# Altium PCB PM06-2305-IMU小板.PcbDoc
Units mil, origin at the board's own origin, x right, y up, seen from the top; angles counter-clockwise.
Board outline 600 x 480 mil, 2 copper layers (Top Layer, Bottom Layer); 5 components, 10 nets, 34 pads, 114 vias.
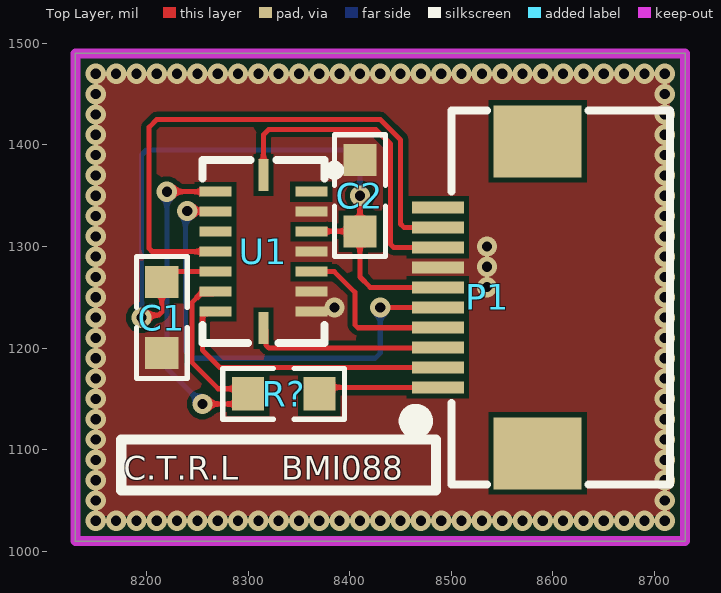
[diagram p0: Top Layer view]
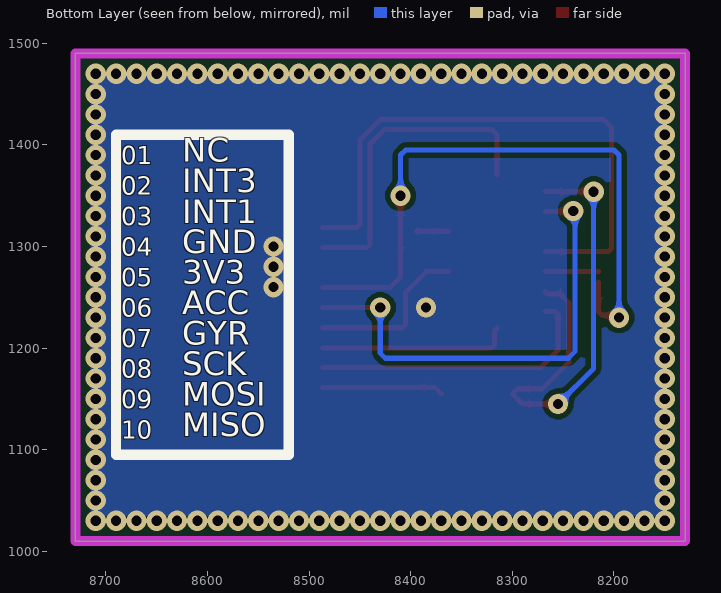
[diagram p1: Bottom Layer view, seen from below]
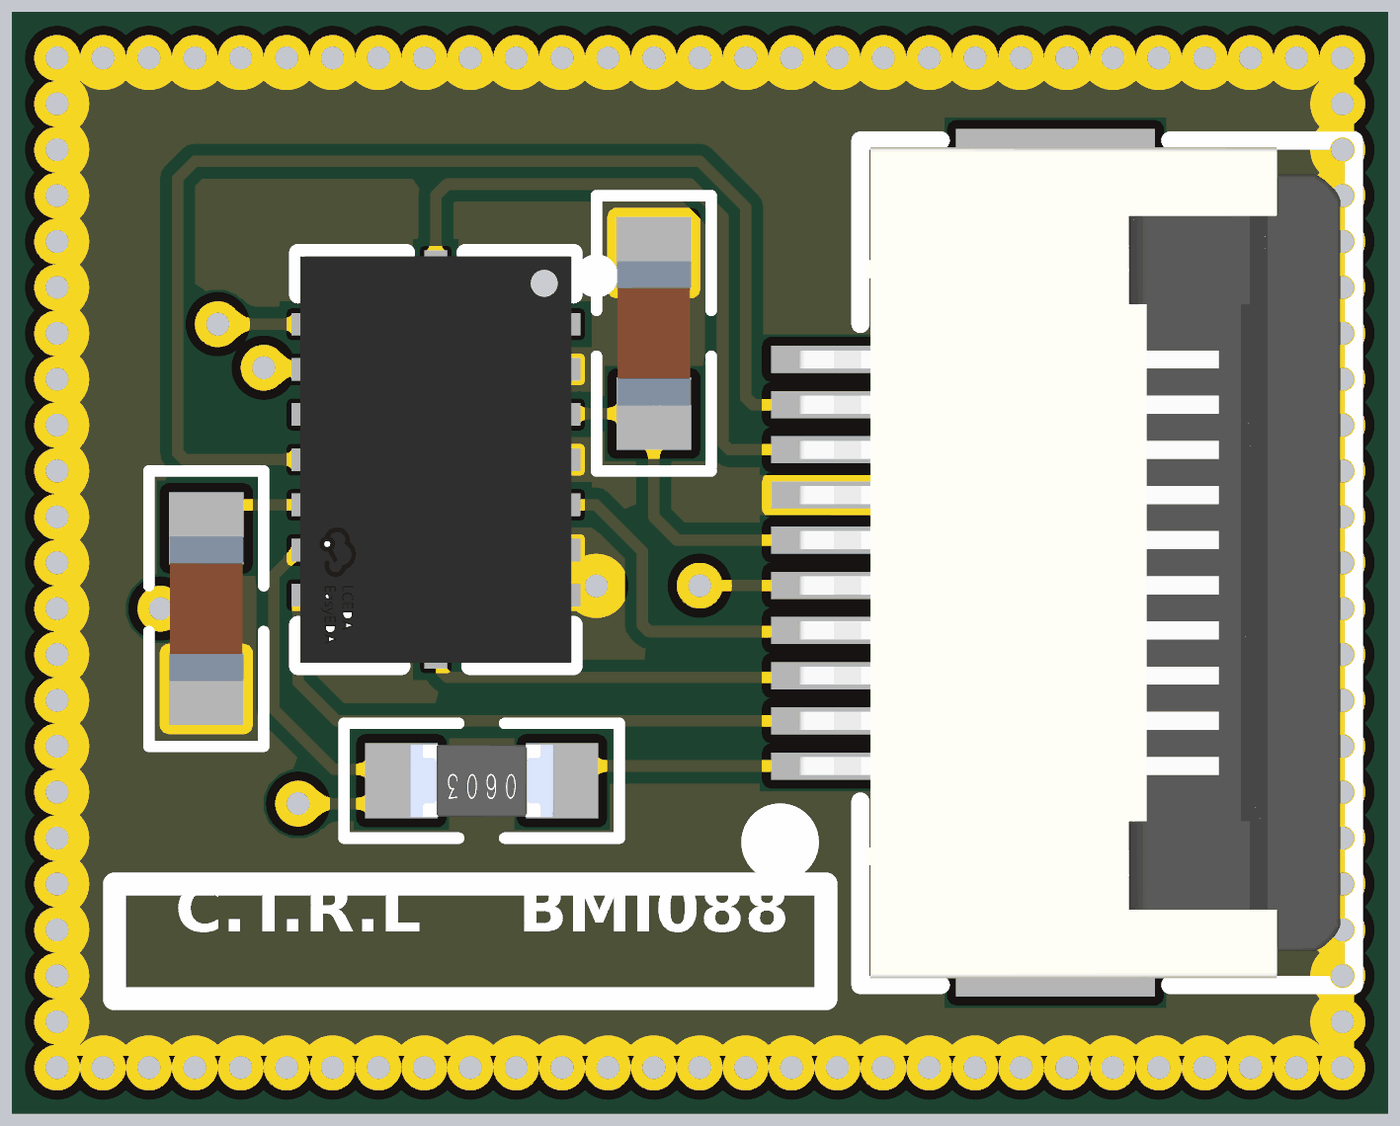
[diagram p2: 3D render of the assembled board from above, using the file's embedded part models]

## Layer stack, top to bottom
Top Solder: solder mask 0.4, Solder Resist, Dk 3.5
Top Layer: signal copper 1.4
Dielectric 1: dielectric 12.6, FR-4, Dk 4.8
Bottom Layer: signal copper 1.4
Bottom Solder: solder mask 0.4, Solder Resist, Dk 3.5

## Board outline
8130,1010 8130,1490 8730,1490 8730,1010

## Design rules (kind name [scope] priority, off if disabled: settings)
Clearance [All] p1: gap=5 ignorepadtopadclearanceinfootprint=FALSE
PolygonConnect [All] p1: connectstyle=Direct reliefconductorwidth=10 reliefentries=4 polygonreliefangle="90 Angle" airgapwidth=10
RoutingVias [All] p1: holewidth=10 width=20 viastyle="Through Hole" minholewidth=10 minwidth=20 maxholewidth=28 maxwidth=50
SolderMaskExpansion [All] p1: expansion=4 istentingtop=FALSE
Width [All] p1: maxlimit=30 minlimit=5 preferedwidth=10
30 further rules are at their usual default settings.

## Components (designator, comment, footprint, x,y, rotation, side; value= is the part's Value field where it differs from the comment)
C1 "100nF" 0603C 8215,1230 r90 top
C2 "100nF" 0603C 8410,1350 r270 top
P1 "接插件1*10" FPC0.5-WT-10P 8585,1250 r90 top
R? "22" 0603R 8335,1155 r180 top
U1 "BMI088" LGA16 8315,1295 r180 top

## Footprints (in the part's own frame and the unit in brackets; to place one, negate y for a bottom-side part, rotate by r counter-clockwise, add the part's x,y. Pads: shape width x height; smd on the part's side, far side on the other; paste and mask are expansions set on the pad)
0603C [mm] "0603锟斤拷装锟斤拷锟斤拷锟斤拷锟斤拷"
  rect 0.8x0.83 smd: 1(-0.889,0) 2(0.889,0)
  silkscreen extent -1.52,-0.64 1.52,0.64, body extent -0.8,-0.41 0.8,0.41, height 0.81
0603R [mm] "0603锟斤拷装锟斤拷锟斤拷锟斤拷锟矫ｏ拷缺锟斤拷为锟斤拷锟斤拷锟斤拷锟斤拷/锟斤拷锟斤拷"
  rect 0.8x0.83 smd: 1(-0.889,0) 2(0.889,0)
  silkscreen extent -1.52,-0.64 1.52,0.64, body extent -0.8,-0.4 0.8,0.4, height 0.42
FPC0.5-WT-10P [mm]
  rect 1.8x2.2 smd: 0(-3.9,0) 0(3.9,0)
  rect 0.3x1.3 smd: 1(-2.25,2.497) 2(-1.75,2.497) 3(-1.25,2.497) 4(-0.75,2.497) 5(-0.25,2.497) 6(0.25,2.497) 7(0.75,2.497) 8(1.25,2.497) 9(1.75,2.497) 10(2.25,2.497)
  silkscreen extent -4.67,-3.3 4.67,3.23, body extent -4.6,-3.15 4.6,2.85, height 2
LGA16 [mm]
  rect 0.8x0.25 smd paste+0 mask+0.051: 1(-1.2,-1.498) 2(-1.2,-0.998) 3(-1.2,-0.498) 4(-1.2,0.002) 5(-1.2,0.502) 6(-1.2,1.002) 7(-1.2,1.502) 9(1.2,1.502) 10(1.2,1.002) 11(1.2,0.502) 12(1.2,0.002) 13(1.2,-0.498) 14(1.2,-0.998) 15(1.2,-1.498)
  rect 0.25x0.8 smd paste+0 mask+0.051: 8(0,1.915) 16(0,-1.915)
  silkscreen extent -1.89,-2.29 1.52,2.29, body extent -1.5,-2.25 1.5,2.25, height 1

## Part data
C1 C2: library part 电容_贴片
R?: library part 电阻_贴片
U1: library part 芯片/IC-陀螺仪-BMI088

## Via types
v1: diameter 20, hole 10, Top Layer to Bottom Layer, 114 vias

## Nets (pads, with @x,y where several pads share a name; then routed paths per layer and width w, separated by ;. In a path a pad name is that pad's centre, name@x,y a point inside that pad or via, vN(x,y) a via of type N, cw(c..) or ccw(c..) an arc to the next point about the centre after c; other vN are vias at no path point)
+3V3: C1.2 C2.2 P1.6 U1.3 U1.11 | length 717.1
  Top Layer w5: v1(8195,1230) 8197.5,1232.5 8212.07,1232.5 8215,1235.43 C1.2 ; C1.2@8215,1275 8215.23,1275.23 U1.11 ; U1.3 8362.64,1315 C2.2@8394.41,1315 ; v1(8410,1350) C2.2 8410,1270 8420.16,1259.84 P1.6
  Bottom Layer w5: v1(8195,1230) 8195,1390 8200,1395 8405,1395 8410,1390 v1(8410,1350)
CSB_ACCEL: P1.5 U1.14 | length 465.5
  Top Layer w5: v1(8240,1335) 8240.35,1334.64 8267.41,1334.64 U1.14 ; v1(8430,1240) 8430.08,1240.08 8486.61,1240.08 P1.5
  Bottom Layer w5: v1(8240,1335) 8238.15,1333.15 8238.15,1196.85 8245,1190 8425,1190 8430,1195 v1(8430,1240)
CSB_GYRO: P1.4 U1.5 | length 166.1
  Top Layer w5: U1.5 8384.77,1275.23 8405,1255 8405,1222.93 8407.93,1220 P1.4@8486.69,1220
GND: C1.1 C2.1 P1.7 U1.2 U1.4 U1.6 U1.7
  other v1: 8150,1030 8150,1030 8170,1030 8190,1030 8210,1030 8230,1030 8250,1030 8270,1030 8290,1030 8310,1030 8330,1030 8350,1030 8370,1030 8390,1030 8410,1030 8430,1030 8450,1030 8470,1030 8490,1030 8510,1030 8530,1030 8550,1030 8570,1030 8590,1030 8610,1030 8630,1030 8650,1030 8670,1030 8690,1030 8710,1030 8710,1030 8150,1050 8710,1050 8150,1070 8710,1070 8150,1090 8710,1090 8150,1110 8710,1110 8150,1130 8710,1130 8150,1150 8710,1150 8150,1170 8710,1170 8150,1190 8710,1190 8150,1210 8710,1210 8150,1230 8710,1230 8384.92,1239.92 8150,1250 8710,1250 8535,1260 8150,1270 8710,1270 8535,1280 8150,1290 8710,1290 8535,1300 8150,1310 8710,1310 8150,1330 8710,1330 8150,1350 8710,1350 8150,1370 8710,1370 8150,1390 8710,1390 8150,1410 8710,1410 8150,1430 8710,1430 8150,1450 8710,1450 8150,1470 8150,1470 8170,1470 8190,1470 8210,1470 8230,1470 8250,1470 8270,1470 8290,1470 8310,1470 8330,1470 8350,1470 8370,1470 8390,1470 8410,1470 8430,1470 8450,1470 8470,1470 8490,1470 8510,1470 8530,1470 8550,1470 8570,1470 8590,1470 8610,1470 8630,1470 8650,1470 8670,1470 8690,1470 8710,1470 8710,1470
INT1: P1.8 U1.16 | length 319.2
  Top Layer w5: U1.16 8315,1410 8320,1415 8425.86,1415 8440,1400.86 8440,1302.14 8442.93,1299.21 P1.8
INT3: P1.9 U1.12 | length 565.9
  Top Layer w5: U1.12 8267.68,1295 8205.43,1295 8202.5,1297.93 8202.5,1417.5 8210,1425 8430,1425 8450,1405 8450,1322.05 8453.16,1318.9 P1.9
MISO: R?.2 U1.10 U1.15 | length 475.1
  Top Layer w5: v1(8220,1353.97) U1.15 ; v1(8255,1145) 8290,1145 R?.2 8295,1160 8270.56,1160 8244.51,1186.05 8244.51,1244.65 8252.99,1253.13 8265.34,1253.13 U1.10
  Bottom Layer w5: v1(8220,1353.97) 8220,1180 v1(8255,1145)
MOSI: P1.2 U1.9 | length 287.9
  Top Layer w5: U1.9 8257.42,1235.86 8255,1233.44 8255,1197.93 8271.83,1181.1 P1.2
NetP1_1: P1.1 R?.1 | length 119.4
  Top Layer w5: R?.1 8376.42,1161.42 P1.1
SCK: P1.3 U1.8 | length 188.2
  Top Layer w5: U1.8 8317.42,1217.19 8317.42,1202.93 8320.35,1200 P1.3@8486.69,1200
pads on no net: P1.0 P1.10 U1.1 U1.13

## Polygon pours and split planes (outlines as drawn)
GND on Top Layer "GND_L01_P000" (solid, pour order 0): 8715,1470 8715,1035 8148.98,1035 8148.98,1470
GND on Bottom Layer "GND_L02_P001" (solid, pour order 1): 8715,1470 8715,1035 8150,1035 8150,1470

## Keep-outs
Keep-Out Layer:
  the board outline again, w10

## Silkscreen, mask and mechanical layers (free items; w line width, h text height)
Top Overlay:
  lines w10: 8175,1060 8485,1060 8485,1110 8175,1110 8175,1060
  text "C.T.R.L" at 8177.5,1062.66 h40
  text "BMI088" at 8332.5,1062.66 h40
Bottom Overlay:
  lines w10: 8520,1095 8690,1095 8690,1410 8520,1410 8520,1095
  text "NC" at 8625,1375.44 h40
  text "01" at 8685,1375 h30
  text "INT3" at 8625,1345.47 h40
  text "02" at 8685,1345 h30
  text "INT1" at 8625,1315 h40
  text "03" at 8685,1315 h30
  text "GND" at 8625,1285.47 h40
  text "04" at 8685,1285 h30
  text "3V3" at 8625,1255.47 h40
  text "05" at 8685,1255 h30
  text "ACC" at 8625,1225.44 h40
  text "06" at 8685,1225 h30
  text "GYR" at 8625,1195.47 h40
  text "07" at 8685,1195 h30
  text "SCK" at 8625,1165.47 h40
  text "08" at 8685,1165 h30
  text "MOSI" at 8625,1135.47 h40
  text "09" at 8685,1135 h30
  text "MISO" at 8625,1105.47 h40
  text "10" at 8685,1105 h30
Top Solder:
  lines w20: 8150,1030 8710,1030 8710,1470 8150,1470 8150,1030
Bottom Solder:
  lines w20: 8150,1030 8710,1030 8710,1470 8150,1470 8150,1030